# EAGLE board dwm1000v3 (EAGLE 8.3.2)
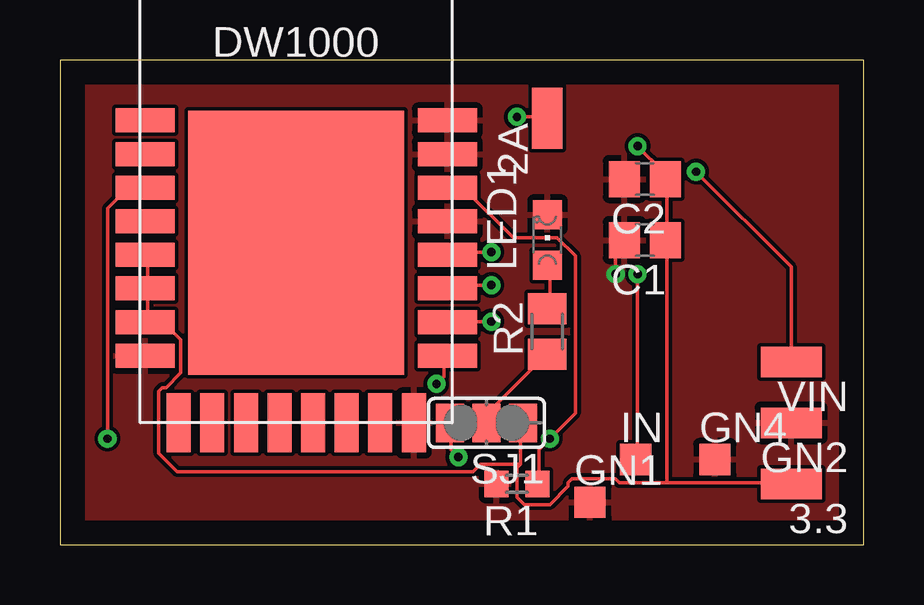
[diagram p0: board, top side]
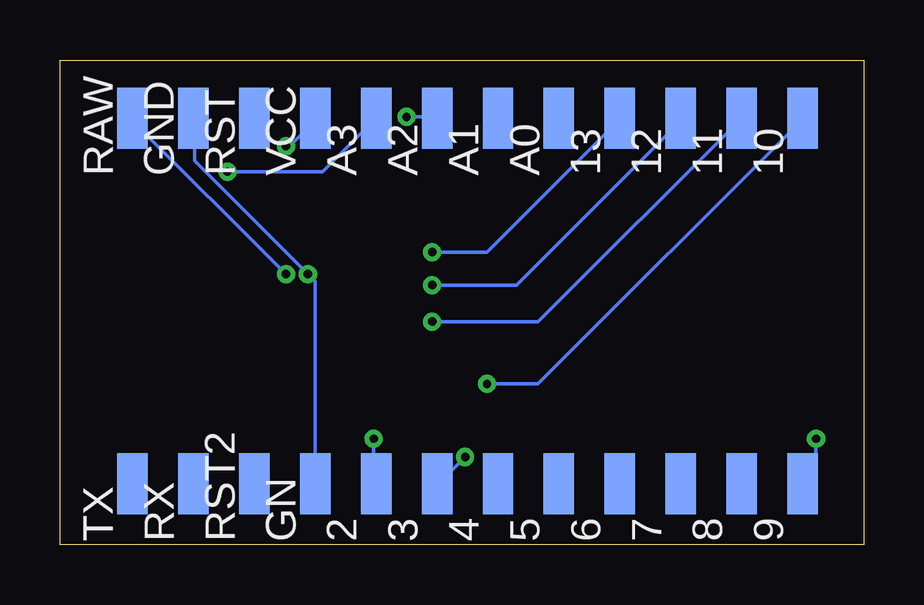
[diagram p1: board, bottom side, seen from below]

Size 33.5 x 20.2 mm. Coordinates in mm from the lower left corner, seen from the top.
Outline: 0,0 33.5,0 33.5,20.2 0,20.2 0,0
Copper layers (1*16): Top 0.035mm / dielectric 1.5mm / Bottom 0.035mm
Design rules "default": minimum track width 6mil, minimum drill 0.35mm, track to track 6mil, track to pad 6mil, pad to pad 6mil, via to via 6mil, smd to smd 6mil, copper to edge 40mil, drill to drill 6mil, minimum pad ring 10mil, minimum via ring 8mil, stop-mask expansion 4mil, vias tented up to drill 0mil, thermal gap 10mil

## Footprints (pad centres in the part's own frame; a part is rotated, then mirrored left to right if it is on the bottom)
SMD1,27-2,54 = smd 1.27 x 2.54: 1 0,0
C0805 = smd 1.3 x 1.5: 1 -0.85,0; 2 0.85,0
TP13SQ = smd 1.3 x 1.3: TP 0,0
CHIPLED_0805 = smd 1.2 x 1.2: A 0,-1.05; C 0,1.05
R0603 = smd 1 x 1.1: 1 -0.85,0; 2 0.85,0
M0805 = smd 1.3 x 1.6: 1 -0.95,0; 2 0.95,0
SJ_2 = smd 1.168 x 1.6: 1 -1.524,0; 2 0,0; 3 1.524,0
DWM1000 = smd 2.45 x 1: EXTON -2.8,12.6; GPIO7 -2.8,8.4; IRQ/GPIO8 9.8,9.8; RST -2.8,9.8; SPICLK 9.8,7; SPICSN 9.8,2.8; SPIMISO 9.8,5.6; SPIMOSI 9.8,4.2; VDD3V3 -2.8,4.2; VDD3V3.2 -2.8,5.6; VDDAON -2.8,7; VSS -2.8,2.8; VSS.2 9.8,12.6; VSS.3 9.8,11.2; VSS.4 9.8,8.4; WAKEUP -2.8,11.2 | smd 9 x 11: GND 3.5,7.5 | smd 1 x 2.45: GPIO0 7,0; GPIO1 5.6,0; GPIO2 4.2,0; GPIO3 2.8,0; GPIO4 1.4,0; GPIO5 0,0; GPIO6 -1.4,0; VSS.5 8.4,0

## Placement (x,y rotation side)
2  [SMD1,27-2,54]  20.32,2.54 0 bottom
2A  [SMD1,27-2,54]  20.32,17.78 0 top
3  [SMD1,27-2,54]  17.78,2.54 0 bottom
3.3  [SMD1,27-2,54]  30.48,2.54 90 top
4  [SMD1,27-2,54]  15.24,2.54 0 bottom
5  [SMD1,27-2,54]  12.7,2.54 0 bottom
6  [SMD1,27-2,54]  10.16,2.54 0 bottom
7  [SMD1,27-2,54]  7.62,2.54 0 bottom
8  [SMD1,27-2,54]  5.08,2.54 0 bottom
9  [SMD1,27-2,54]  2.54,2.54 0 bottom
10  [SMD1,27-2,54]  2.54,17.78 0 bottom
11  [SMD1,27-2,54]  5.08,17.78 0 bottom
12  [SMD1,27-2,54]  7.62,17.78 0 bottom
13  [SMD1,27-2,54]  10.16,17.78 0 bottom
A0  [SMD1,27-2,54]  12.7,17.78 0 bottom
A1  [SMD1,27-2,54]  15.24,17.78 0 bottom
A2  [SMD1,27-2,54]  17.78,17.78 0 bottom
A3  [SMD1,27-2,54]  20.32,17.78 0 bottom
C1  [C0805]  24.38,12.7 180 top
C2  [C0805]  24.38,15.24 180 top
GN  [SMD1,27-2,54]  22.86,2.54 0 bottom
GN1  TPTP13SQ  [TP13SQ]  22.1,1.78 0 top
GN2  [SMD1,27-2,54]  30.48,5.08 90 top
GN4  TPTP13SQ  [TP13SQ]  27.3,3.56 0 top
GND  [SMD1,27-2,54]  27.94,17.78 0 bottom
IN  TPTP13SQ  [TP13SQ]  24,3.56 0 top
LED1  [CHIPLED_0805]  20.32,12.7 0 top
R1  [R0603]  19.05,2.54 180 top
R2  [M0805]  20.32,8.89 90 top
RAW  [SMD1,27-2,54]  30.48,17.78 0 bottom
RST  [SMD1,27-2,54]  25.4,17.78 0 bottom
RST2  [SMD1,27-2,54]  25.4,2.54 0 bottom
RX  [SMD1,27-2,54]  27.94,2.54 0 bottom
SJ1  [SJ_2]  17.78,5.08 180 top
TX  [SMD1,27-2,54]  30.48,2.54 0 bottom
U$1  DWM1000  [DWM1000]  6.35,5.08 0 top
VCC  [SMD1,27-2,54]  22.86,17.78 0 bottom
VIN  [SMD1,27-2,54]  30.48,7.62 90 top

## Library data of the parts
2 2A 3 3.3 4-13 A0 A1-A3 GN GN2 GND RAW RST RST2 RX TX VCC VIN = wirepad
C1 C2 LED1 R1 R2 = adafruit
GN1 GN4 IN = testpad
SJ1 = jumper
U$1 = dwm1000

## Nets
+3V3: 3.3.1 C1.1 C2.1 SJ1.1 U$1.VDD3V3 U$1.VDD3V3.2 U$1.VDDAON VCC.1
GND: C1.2 C2.2 GN1.TP GN2.1 GN4.TP GN.1 GND.1 LED1.C R1.2 U$1.VSS U$1.VSS.2 U$1.VSS.3 U$1.VSS.4 U$1.VSS.5
N$1: 10.1 U$1.SPICSN
N$2: 9.1 U$1.RST
N$3: 12.1 U$1.SPIMISO
N$4: 11.1 U$1.SPIMOSI
N$5: 13.1 U$1.SPICLK
N$6: 2.1 R1.1 U$1.IRQ/GPIO8
N$7: LED1.A R2.2
N$8: R2.1 SJ1.2
N$9: 3.1 SJ1.3
N$10: IN.TP RAW.1
N$11: A3.1 VIN.1
N$13: 2A.1 A2.1

## Tracks (layer width: path | path; a pad name or v marks a point on that pad's centre or on a via)
+3V3  (via drill 0.35)
  Top 0.152: U$1.VDDAON 3.66,12.04 3.66,10.82 U$1.VDD3V3.2 3.66,10.67 3.66,9.3 U$1.VDD3V3 3.66,9.14 4.42,9.14 5.03,8.53 5.03,7.16 4.42,6.55 4.27,6.55 4.12,6.4 4.12,3.81 4.88,3.05 17.22,3.05 17.53,3.35 19.2,3.35 | 19.2,3.35 19.2,5.03 SJ1.1 | 19.2,3.35 19.05,3.2 19.05,1.98 19.36,1.68 20.42,1.68 21.18,2.44 21.18,2.59 21.34,2.74 23.16,2.74 23.32,2.59 25.3,2.59 | 25.3,2.59 30.48,2.59 3.3.1 | 25.3,2.59 25.3,12.65 C1.1 25.3,12.8 25.3,15.24 C2.1 25.15,15.24 25.15,15.54 v24.08,16.61
  Bottom 0.152: v24.08,16.61 23.93,16.61 22.86,17.68 VCC.1
GND  (via drill 0.35)
  Top 0.152: v23.16,11.28 23.16,12.34 23.47,12.65 C1.2
  Bottom 0.152: GN.1 22.86,10.97 v23.16,11.28 27.89,16 27.89,17.68 GND.1
  pour Top: 0,20.32 35.56,20.32 35.56,-1.27 0,-1.27
N$1  (via drill 0.35)
  Top 0.152: v15.7,6.71 16,7.01 16,7.77 U$1.SPICSN
  Bottom 0.152: v15.7,6.71 13.56,6.71 2.59,17.68 10.1
N$2  (via drill 0.35)
  Top 0.152: v1.98,4.42 1.98,14.02 2.74,14.78 3.5,14.78 U$1.RST
  Bottom 0.152: v1.98,4.42 1.98,3.05 2.44,2.59 9.1
N$3  (via drill 0.35)
  Top 0.152: v17.98,10.82 16.15,10.82 U$1.SPIMISO
  Bottom 0.152: v17.98,10.82 14.48,10.82 7.62,17.68 12.1
N$4  (via drill 0.35)
  Top 0.152: v17.98,9.3 16.15,9.3 U$1.SPIMOSI
  Bottom 0.152: v17.98,9.3 13.56,9.3 11.1
N$5  (via drill 0.35)
  Top 0.152: v17.98,12.19 16.15,12.19 U$1.SPICLK
  Bottom 0.152: v17.98,12.19 15.7,12.19 10.21,17.68 13.1
N$6  (via drill 0.35)
  Top 0.152: R1.1 19.96,2.59 19.96,3.96 v20.42,4.42 21.49,5.49 21.49,12.04 20.73,12.8 18.9,12.8 16.92,14.78 16.15,14.78 U$1.IRQ/GPIO8
  Bottom 0.152: v20.42,4.42 20.42,2.59 2.1
N$7
  Top 0.152: LED1.A 20.42,11.58 20.42,9.91 R2.2
N$8
  Top 0.152: R2.1 20.27,7.92 17.83,5.49 17.83,5.18 SJ1.2
N$9  (via drill 0.35)
  Top 0.152: v16.61,3.66 16.31,3.96 16.31,5.03 SJ1.3
  Bottom 0.152: v16.61,3.66 17.68,2.59 3.1
N$10  (via drill 0.35)
  Top 0.152: v24.08,11.28 24.08,3.66 IN.TP
  Bottom 0.152: v24.08,11.28 30.48,17.68 RAW.1
N$11  (via drill 0.35)
  Top 0.152: VIN.1 30.48,11.58 v26.52,15.54
  Bottom 0.152: v26.52,15.54 22.55,15.54 A3.1
N$13  (via drill 0.35)
  Top 0.152: v19.05,17.83 20.27,17.83 2A.1
  Bottom 0.152: v19.05,17.83 17.83,17.83 A2.1